# EAGLE board B684C (EAGLE 6.6.0)
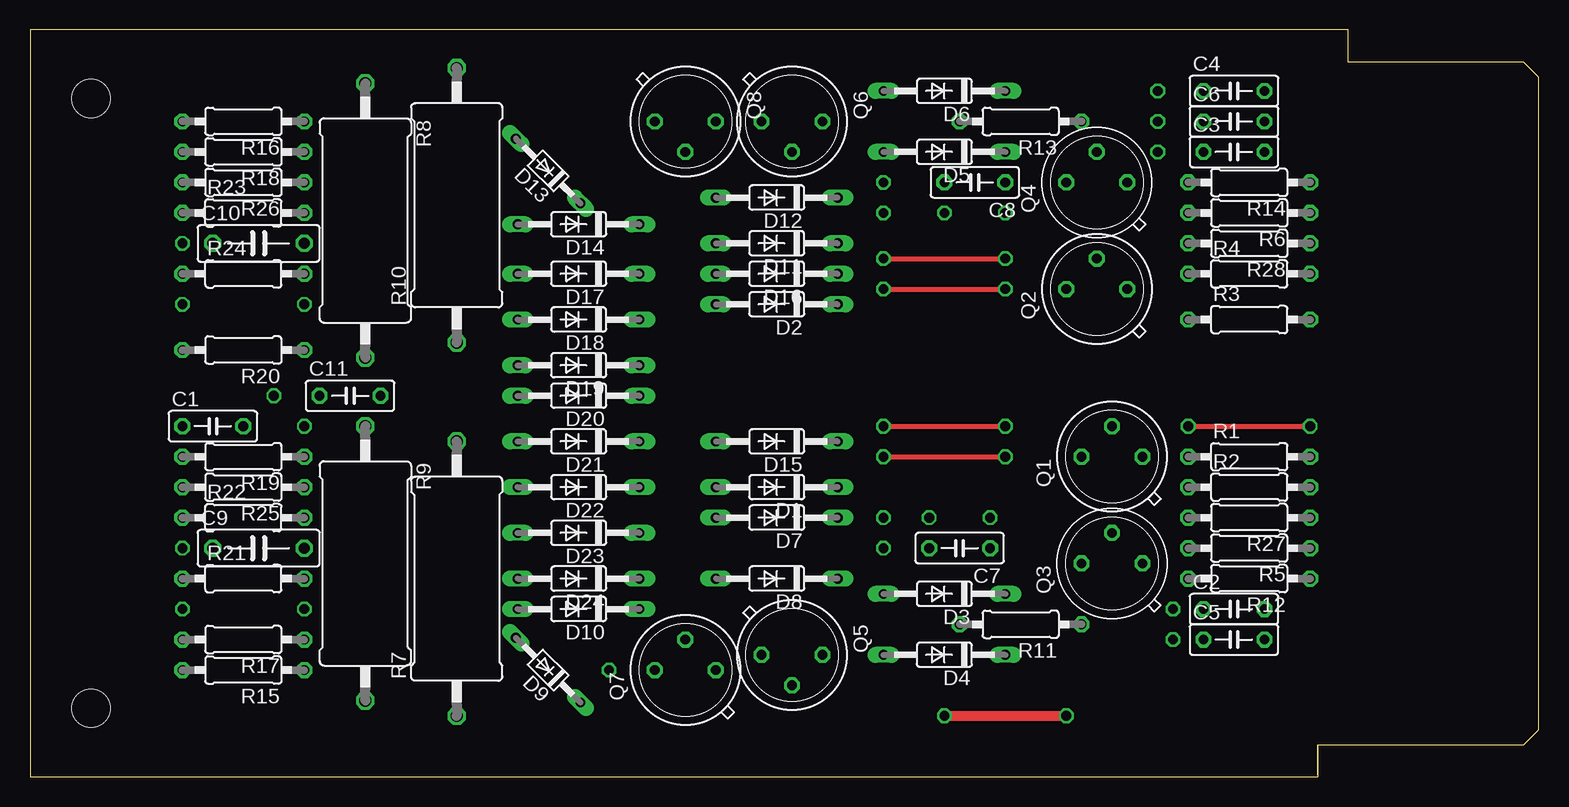
[diagram p0: board, top side]
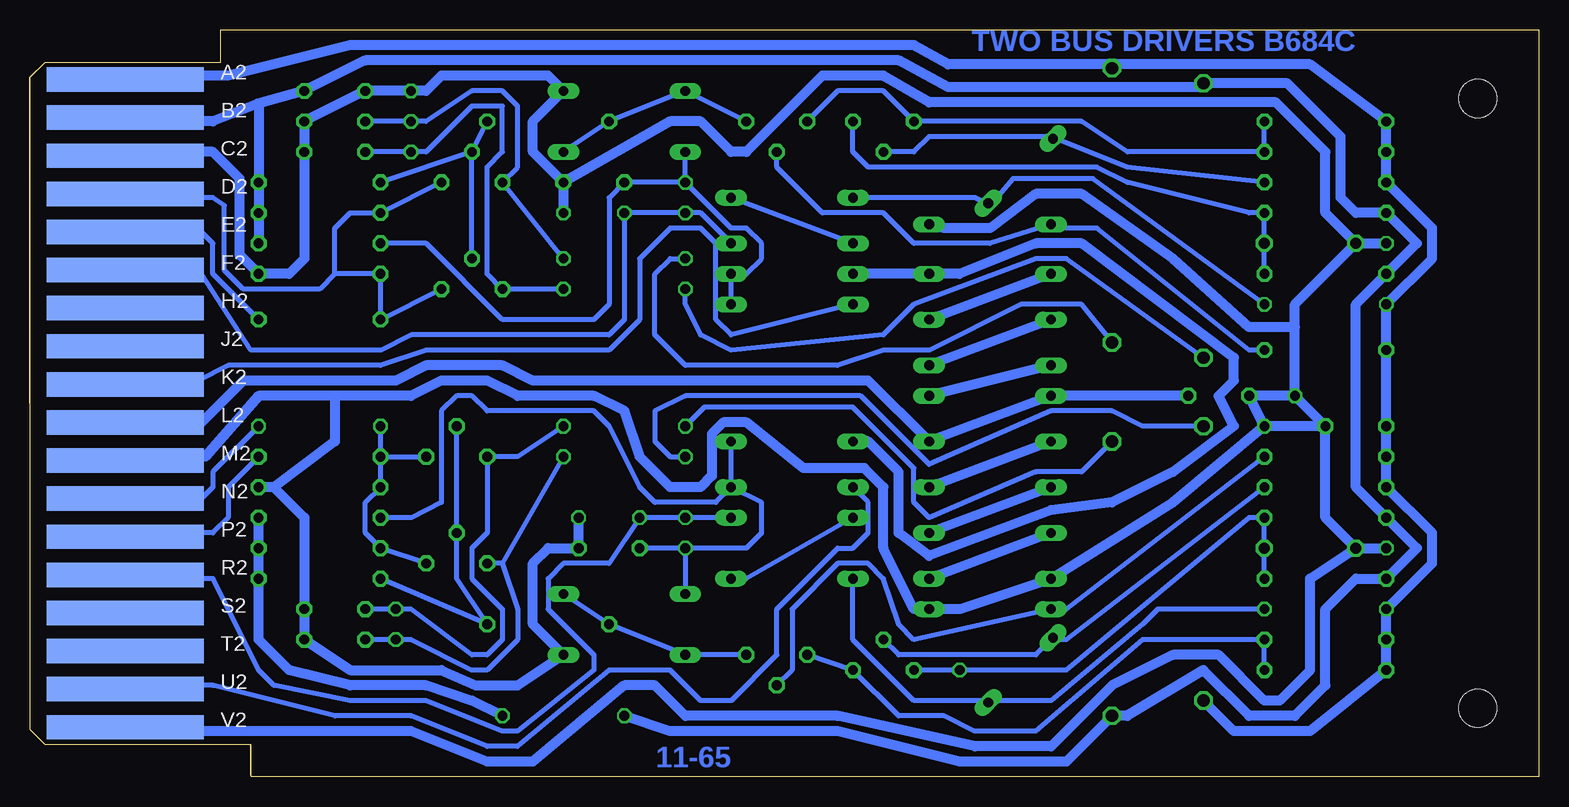
[diagram p1: board, bottom side, seen from below]

Size 125.73 x 62.23 mm. Coordinates in mm from the lower left corner, seen from the top.
Copper layers (1+16): Top 0.035mm / dielectric 1.5mm / Bottom 0.035mm
Design rules "16mils": minimum track width 16mil, minimum drill 32mil, track to track 15mil, track to pad 10mil, pad to pad 10mil, via to via 10mil, smd to smd 10mil, copper to edge 13mil, drill to drill 10mil, minimum pad ring 10mil, minimum via ring 8mil, stop-mask expansion 0mil, vias tented up to drill 0mil, thermal gap 10mil
Net classes: 1 Power: width 0.813 mm

## Footprints (pad centres in the part's own frame; a part is rotated, then mirrored left to right if it is on the bottom)
C050-025X075 = drill 0.813 octagon: 1 -2.54,0; 2 2.54,0
C075-032X103 = drill 0.914 octagon: 1 -3.81,0; 2 3.81,0
DO35-10 = drill 0.813 long: A 5.08,0; C -5.08,0
DO34-7 = drill 0.813 long: A 3.81,0; C -3.81,0
TO39 = drill 0.813 octagon: 1 0,-2.54; 2 2.54,0; 3 0,2.54
TO5 = drill 0.813 octagon: 1 0,-2.54; 2 2.54,0; 3 0,2.54
0207/10 = drill 0.813 octagon: 1 -5.08,0; 2 5.08,0
P0817/22 = drill 1.016 octagon: 1 -11.43,0; 2 11.43,0
SINGLE = hole 3.175: 120.65,56.515; 120.65,5.715
EDGE-CON1 = smd 13.106 x 2.032 bottom: A2 7.938,4.128; B2 7.938,7.303; C2 7.938,10.477; D2 7.938,13.652; E2 7.938,16.828; F2 7.938,20.003; H2 7.938,23.177; J2 7.938,26.352; K2 7.938,29.527; L2 7.938,32.703; M2 7.938,35.877; N2 7.938,39.053; P2 7.938,42.227; R2 7.938,45.403; S2 7.938,48.578; T2 7.938,51.752; U2 7.938,54.928; V2 7.938,58.102

## Placement (x,y rotation side)
C1  .01uF  [C050-025X075]  15.24,29.21 0 top
C2  .01uF  [C050-025X075]  100.33,13.97 0 top
C3  .01uF  [C050-025X075]  100.33,52.07 0 top
C4  .01uF  [C050-025X075]  100.33,57.15 0 top
C5  .01uF  [C050-025X075]  100.33,11.43 0 top
C6  .01uF  [C050-025X075]  100.33,54.61 0 top
C7  .01uF  [C050-025X075]  77.47,19.05 180 top
C8  .01uF  [C050-025X075]  78.74,49.53 180 top
C9  56pF  [C075-032X103]  19.05,19.05 0 top
C10  56pF  [C075-032X103]  19.05,44.45 0 top
C11  .01uF  [C050-025X075]  26.67,31.75 0 top
D1  1N3606  [DO35-10]  62.23,24.13 180 top
D2  1N3606  [DO35-10]  62.23,39.37 180 top
D3  1N3606  [DO35-10]  76.2,15.24 180 top
D4  1N3606  [DO35-10]  76.2,10.16 180 top
D5  1N3606  [DO35-10]  76.2,52.07 180 top
D6  1N3606  [DO35-10]  76.2,57.15 180 top
D7  1N645  [DO35-10]  62.23,21.59 180 top
D8  1N645  [DO35-10]  62.23,16.51 180 top
D9  1N645  [DO34-7]  43.18,8.89 135 top
D10  1N645  [DO35-10]  45.72,13.97 180 top
D11  1N645  [DO35-10]  62.23,44.45 180 top
D12  1N645  [DO35-10]  62.23,48.26 180 top
D13  1N645  [DO34-7]  43.18,50.48 135 top
D14  1N645  [DO35-10]  45.72,46.04 180 top
D15  1N3606  [DO35-10]  62.23,27.94 180 top
D16  1N3606  [DO35-10]  62.23,41.91 180 top
D17  1N645  [DO35-10]  45.72,41.91 180 top
D18  1N645  [DO35-10]  45.72,38.1 180 top
D19  1N645  [DO35-10]  45.72,34.29 180 top
D20  1N645  [DO35-10]  45.72,31.75 180 top
D21  1N645  [DO35-10]  45.72,27.94 180 top
D22  1N645  [DO35-10]  45.72,24.13 180 top
D23  1N645  [DO35-10]  45.72,20.32 180 top
D24  1N645  [DO35-10]  45.72,16.51 180 top
Q1  2N2904  [TO39]  90.17,26.67 90 top
Q2  2N2904  [TO39]  88.9,40.64 90 top
Q3  2N2219  [TO5]  90.17,17.78 90 top
Q4  2N2219  [TO5]  88.9,49.53 90 top
Q5  DEC6  [TO39]  63.5,10.16 270 top
Q6  DEC6  [TO39]  63.5,54.61 270 top
Q7  DEC6  [TO39]  54.61,8.89 90 top
Q8  DEC6  [TO39]  54.61,54.61 270 top
R1  82  [0207/10]  101.6,26.67 0 top
R2  220 5%  [0207/10]  101.6,24.13 0 top
R3  82  [0207/10]  101.6,38.1 0 top
R4  220 5%  [0207/10]  101.6,41.91 0 top
R5  1.5K 5%  [0207/10]  101.6,19.05 180 top
R6  1.5K 5%  [0207/10]  101.6,46.99 180 top
R7  100 2W  [P0817/22]  35.56,16.51 90 top
R8  100 2W  [P0817/22]  27.94,46.35 270 top
R9  150 2W  [P0817/22]  27.94,17.78 270 top
R10  150 2W  [P0817/22]  35.56,47.62 90 top
R11  10  [0207/10]  82.55,12.7 180 top
R12  1.5K 5%  [0207/10]  101.6,16.51 180 top
R13  10  [0207/10]  82.55,54.61 180 top
R14  1.5K 5%  [0207/10]  101.6,49.53 180 top
R15  750 5%  [0207/10]  17.78,8.89 180 top
R16  750 5%  [0207/10]  17.78,54.61 180 top
R17  750 5%  [0207/10]  17.78,11.43 180 top
R18  750 5%  [0207/10]  17.78,52.07 180 top
R19  12K  [0207/10]  17.78,26.67 180 top
R20  12K  [0207/10]  17.78,35.56 180 top
R21  560  [0207/10]  17.78,16.51 0 top
R22  560  [0207/10]  17.78,21.59 0 top
R23  560  [0207/10]  17.78,46.99 0 top
R24  560  [0207/10]  17.78,41.91 0 top
R25  100K  [0207/10]  17.78,24.13 180 top
R26  100K  [0207/10]  17.78,49.53 180 top
R27  1500 5%  [0207/10]  101.6,21.59 180 top
R28  1500 5%  [0207/10]  101.6,44.45 180 top
U$1  OUTLINE-SINGLE  [SINGLE]  125.73,62.23 180 top
U$2  EDGE-1  [EDGE-CON1]  125.73,62.23 180 top

## Library data of the parts
C1-C11 R1-R28 = rcl
D1-D24 = diode
Q1 Q2 Q5-Q8 = transistor-pnp
Q3 Q4 = transistor
U$1 U$2 = dec-con

## Nets
+10V [Power]: C1.1 R9.2 R10.2 R15.2 R16.2 R17.2 R18.2 R19.2 R20.2 R25.2 R26.2 U$2.A2
-3V [Power]: C11.2 D20.A D21.C U$2.L2
-6V@1: C7.2 D1.C D3.A D15.C R27.2
-6V@2: C8.2 D2.C D5.A D16.C R28.2
-15V [Power]: C4.2 R5.1 R6.1 R7.1 R8.1 R12.1 R14.1 R21.1 R22.1 R23.1 R24.1 R27.1 R28.1 U$2.B2
GND [Power]: C1.2 C2.2 C3.2 C4.1 C5.2 C6.2 C7.1 C8.1 C9.1 C10.1 C11.1 D4.C D6.C D10.C D14.C D24.A R2.2 R4.2 U$2.C2 U$2.M2 U$2.V2
N$1: D11.C U$2.F2
N$2: D11.A D12.C
N$3: D13.A Q8.2 R26.1
N$4: D12.A D13.C
N$6: C10.2 Q8.3 R23.2 R24.2
N$7: Q6.1 Q8.1 R16.1 R18.1
N$8: D14.A Q6.2 R20.1
N$9: Q2.1 Q4.1 R3.1 R4.1 R6.2 U$2.D2
N$10: C6.1 Q4.3 R10.1
N$11: C3.1 Q2.3 R8.2
N$12: D18.A D19.C
N$13: D22.A D23.C
N$14: D5.C D6.A Q6.3 R13.2
N$15: Q2.2 Q4.2 R13.1 R14.2
N$16: D21.A D22.C
N$17: D2.A U$2.K2
N$18: R3.2 U$2.E2
N$19: D7.C U$2.R2
N$20: D17.A D18.C
N$21: D7.A D8.C
N$22: D8.A D9.C
N$23: D9.A Q7.2 R25.1
N$24: D19.A D20.C
N$26: C9.2 Q7.3 R21.2 R22.2
N$27: Q5.1 Q7.1 R15.1 R17.1
N$28: D10.A Q5.2 R19.1
N$29: D3.C D4.A Q5.3 R11.2
N$30: Q1.2 Q3.2 R11.1 R12.2
N$31: D1.A U$2.U2
N$32: D15.A D16.A D17.C
N$33: Q1.1 Q3.1 R1.1 R2.1 R5.2 U$2.N2
N$34: C5.1 Q3.3 R9.1
N$35: C2.1 Q1.3 R7.2
N$36: R1.2 U$2.P2
N$37: D23.A D24.C

## Tracks (layer width: path | path; a pad name or v marks a point on that pad's centre or on a via)
+10V  (via drill 0.81)
  Bottom 0.813: R9.2 25.4,3.81 19.05,3.81 R15.2 R17.2 v12.7,13.97 8.89,17.78 8.89,20.32 R25.2 R19.2 C1.1 R20.2 v12.7,39.37 8.89,43.18 8.89,45.72 R26.2 R18.2 R16.2 19.05,59.37 35.56,59.37 | U$2.A2 116.84,58.42 109.22,58.42 99.06,60.96 52.07,60.96 49.21,59.37 35.56,59.37 | 35.56,59.37 R10.2
-3V
  Bottom 0.813: U$2.L2 116.84,29.21 111.76,29.21 107.95,33.02 95.25,33.02 92.71,34.29 86.36,34.29 83.82,33.02 55.88,33.02 D21.C D20.A C11.2
-6V@1  (via drill 0.81)
  Bottom 0.406: D1.C 68.58,22.86 73.66,22.86 74.93,24.13 77.47,29.21 78.74,30.48 87.63,30.48 88.9,31.75 90.17,31.75 91.44,30.48 91.44,22.86 93.98,21.59 R27.2 | v71.12,19.05 D3.A | v71.12,19.05 66.04,19.05 64.77,20.32 64.77,22.86 D1.C | v71.12,19.05 C7.2 | D1.C D15.C
-6V@2  (via drill 0.81)
  Bottom 0.406: D2.C D16.C 66.04,41.91 64.77,43.18 64.77,44.45 66.04,45.72 67.31,45.72 v71.12,49.53 | v71.12,49.53 D5.A | v71.12,49.53 C8.2 77.47,48.26 77.47,39.37 78.74,38.1 86.36,38.1 92.71,44.45 R28.2
-15V  (via drill 0.81)
  Top 0.813: v76.2,5.08 v86.36,5.08
  Bottom 0.813: R27.1 R5.1 R12.1 106.68,11.43 104.14,8.89 99.06,7.62 92.71,7.62 88.9,6.35 v86.36,5.08 | v76.2,5.08 72.39,3.81 58.42,3.81 48.26,1.27 39.37,1.27 R7.1 34.29,5.08 27.94,8.89 24.13,5.08 20.32,5.08 17.78,7.62 17.78,13.97 15.24,16.51 R21.1 10.16,19.05 R22.1 15.24,24.13 15.24,39.37 R24.1 10.16,44.45 R23.1 15.24,46.99 16.51,48.26 16.51,53.34 20.95,57.78 R8.1 27.94,57.47 49.21,57.47 53.34,59.69 97.79,59.69 C4.2 106.77,56.1 | U$2.B2 116.84,54.61 110.49,54.61 106.77,56.1 | 106.77,56.1 106.68,55.88 R14.1 R6.1 R28.1
GND  (via drill 0.81)
  Bottom 0.813: U$2.V2 117.16,4.13 116.84,3.81 93.98,3.81 87.63,1.27 83.82,1.27 76.2,7.62 73.66,7.62 71.12,5.08 58.42,5.08 46.99,2.54 40.64,2.54 35.56,7.62 30.48,10.16 26.67,10.16 22.86,6.35 21.59,6.35 19.05,8.89 19.05,16.51 C9.1 | 105.41,24.13 102.87,21.59 C2.2 C5.2 99.06,8.89 91.44,8.89 88.58,7.62 85.09,7.62 D4.C 83.82,12.7 83.82,17.78 82.55,19.05 C7.1 v80.01,21.59 | 105.41,24.13 R2.2 | U$2.M2 116.84,26.67 111.12,26.67 106.68,31.75 100.33,31.75 | 100.33,31.75 100.33,27.94 105.41,24.13 | 100.33,31.75 93.98,31.75 91.44,33.02 87.63,33.02 85.09,31.75 78.74,31.75 76.2,30.48 74.93,26.67 72.39,24.13 69.85,24.13 68.9,25.08 68.9,28.57 67.94,29.53 66.04,29.53 61.28,25.72 56.2,25.72 54.61,24.13 54.61,19.05 52.07,13.97 D10.C 48.26,13.97 D24.A 30.48,22.86 v22.86,29.21 | C1.2 v22.86,29.21 | C9.1 17.78,21.59 C1.2 | C9.1 v12.7,19.05 | C10.1 v12.7,44.45 | C1.2 v20.32,31.75 | v20.32,31.75 C11.1 v22.86,29.21 | C10.1 20.32,39.37 20.32,37.47 | v20.32,31.75 20.32,37.47 | D14.C 49.53,45.72 45.72,45.72 41.91,48.58 38.1,48.58 30.48,43.18 24.13,37.47 20.32,37.47 | U$2.C2 116.84,52.07 110.49,52.07 108.27,49.85 108.27,43.5 R4.2 104.14,41.91 102.87,43.18 C3.2 C6.2 C4.1 v93.98,57.15 92.71,57.15 91.44,58.42 82.55,58.42 D6.C 83.82,54.61 83.82,52.07 C8.1 | C8.1 v81.28,46.99 | C8.1 72.39,54.61 69.85,54.61 67.31,52.07 66.04,52.07 59.69,58.42 54.61,58.42 50.8,56.2 21.91,56.2 17.78,52.07 17.78,46.99 C10.1
N$1  (via drill 0.81)
  Bottom 0.406: D11.C 69.85,46.99 v71.12,46.99 v76.2,46.99 76.2,38.1 77.47,36.83 93.98,36.83 96.52,35.56 107.31,35.56 111.44,41.91 116.84,41.91 U$2.F2
N$2
  Bottom 0.406: D11.A D12.C
N$3
  Bottom 0.406: R26.1 34.29,50.8 40.64,53.34 | 40.64,53.34 50.8,53.34 52.07,52.07 Q8.2 | 40.64,53.34 D13.A
N$4  (via drill 0.81)
  Bottom 0.406: 45.72,47.62 D13.C | 45.72,47.62 46.99,48.26 D12.A | 45.72,47.62 43.81,49.85 37.15,49.85 v22.86,39.37
N$6
  Bottom 0.406: Q8.3 57.15,52.07 55.88,50.8 36.83,50.8 34.29,49.53 24.13,46.99 R23.2 C10.2 R24.2
N$7
  Bottom 0.406: R16.1 R18.1 34.29,52.07 38.1,54.61 Q8.1 54.61,57.15 58.42,57.15 Q6.1
N$8
  Bottom 0.406: Q6.2 63.5,50.8 59.69,46.99 54.61,46.99 52.07,44.45 45.72,44.45 D14.A 39.37,45.72 36.83,45.72 24.13,35.56 R20.1
N$9
  Bottom 0.406: Q2.1 R3.1 R4.1 100.33,41.91 | Q4.1 R6.2 99.06,46.99 100.33,45.72 100.33,41.91 | U$2.D2 116.84,48.26 110.49,48.26 109.54,47.62 109.54,42.23 107.95,40.64 101.6,40.64 100.33,41.91
N$10  (via drill 0.81)
  Top 0.406: v71.12,43.18 v81.28,43.18
  Bottom 0.406: R10.1 38.1,39.37 43.18,39.37 50.8,35.56 54.61,35.56 58.42,34.29 71.12,34.29 73.66,36.83 73.66,41.91 72.39,43.18 v71.12,43.18 | v81.28,43.18 Q4.3 85.09,50.8 85.09,55.88 86.36,57.15 88.9,57.15 92.71,54.61 v93.98,54.61 C6.1
N$11  (via drill 0.81)
  Top 0.406: v71.12,40.64 v81.28,40.64
  Bottom 0.406: R8.2 39.37,43.18 41.91,43.18 52.07,39.37 54.61,36.83 67.31,35.56 69.85,36.83 71.12,39.37 v71.12,40.64 | v81.28,40.64 Q2.3 87.63,41.91 87.63,50.8 86.36,52.07 86.36,55.88 88.9,55.88 92.71,52.07 v93.98,52.07 C3.1
N$12
  Bottom 0.813: D18.A D19.C
N$13
  Bottom 0.813: D22.A D23.C
N$14
  Bottom 0.406: Q6.3 D6.A R13.2 D5.C
N$15
  Bottom 0.406: Q4.2 R13.1 | Q4.2 R14.2 | Q2.2 Q4.2
N$16
  Bottom 0.813: D21.A D22.C
N$17
  Bottom 0.406: U$2.K2 116.84,33.02 111.76,33.02 109.22,34.29 96.52,34.29 92.71,35.56 77.47,35.56 74.93,38.1 74.93,43.18 72.39,45.72 69.85,45.72 68.58,44.45 68.58,38.1 67.31,36.83 D2.A
N$18
  Bottom 0.406: U$2.E2 116.84,45.72 111.76,45.72 110.49,44.45 110.49,41.91 R3.2
N$19  (via drill 0.81)
  Bottom 0.406: U$2.R2 116.84,16.51 110.49,16.51 106.68,8.89 105.41,7.62 99.06,6.35 92.71,6.35 86.36,3.81 85.09,3.81 78.74,8.89 78.74,10.16 82.55,13.97 82.55,16.51 81.28,17.78 77.47,17.78 v74.93,21.59 v71.12,21.59 D7.C
N$20
  Bottom 0.813: D17.A D18.C
N$21
  Bottom 0.406: D7.A 66.04,16.51 D8.C
N$22  (via drill 0.81)
  Bottom 0.406: D8.A 57.15,11.43 52.07,6.35 45.72,6.35 | 45.72,6.35 D9.C | 45.72,6.35 40.64,6.35 33.02,12.7 31.75,13.97 v22.86,13.97
N$23
  Bottom 0.406: R25.1 39.37,11.43 40.64,11.43 | 40.64,11.43 D9.A | Q7.2 53.34,10.16 41.91,10.16 40.64,11.43
N$24
  Bottom 0.813: D19.A D20.C
N$26  (via drill 0.81)
  Bottom 0.406: R21.2 C9.2 R22.2 24.13,21.59 39.37,8.89 v48.26,8.89 Q7.3
N$27
  Bottom 0.406: R15.1 R17.1 33.02,11.43 41.91,3.81 46.99,3.81 49.53,5.08 53.34,5.08 Q7.1 Q5.1
N$28
  Bottom 0.406: R19.1 39.37,13.97 D10.A 52.07,11.43 53.34,12.7 54.61,16.51 55.88,17.78 58.42,17.78 62.23,13.97 62.23,8.89 Q5.2
N$29
  Bottom 0.406: Q5.3 D4.A R11.2 D3.C
N$30
  Bottom 0.406: Q1.2 Q3.2 90.17,16.51 R11.1 R12.2
N$31
  Bottom 0.406: U$2.U2 116.84,7.62 110.49,7.62 100.33,5.08 93.98,5.08 87.63,2.54 85.09,2.54 77.47,8.89 72.39,8.89 69.85,6.35 67.31,6.35 63.5,10.16 63.5,13.97 58.42,19.05 57.15,19.05 55.88,20.32 55.88,22.86 D1.A
N$32
  Bottom 0.813: D16.A D17.C 48.26,41.91 41.91,44.45 38.1,44.45 25.4,34.92 25.4,33.02 26.67,31.75 25.4,29.21 30.48,25.4 35.56,22.86 40.64,22.23 50.8,18.41 53.34,20.32 53.34,25.4 55.88,27.94 D15.A
N$33  (via drill 0.81)
  Top 0.406: v96.52,29.21 v106.68,29.21
  Bottom 0.406: U$2.N2 116.84,22.86 111.76,22.86 110.49,24.13 110.49,25.4 v106.68,29.21 | R1.1 v96.52,29.21 | R1.1 Q1.1 | R1.1 R2.1 97.79,22.86 97.79,20.32 R5.2 Q3.1
N$34  (via drill 0.81)
  Top 0.406: v71.12,26.67 v81.28,26.67
  Bottom 0.406: C5.1 v95.25,11.43 93.98,11.43 88.9,8.89 87.63,8.89 85.09,11.43 85.09,13.97 86.36,17.78 | 86.36,17.78 Q3.3 | R9.1 33.02,29.21 35.56,30.48 40.64,30.48 50.8,26.04 56.52,31.75 71.12,31.75 73.66,30.48 73.66,27.94 72.39,26.67 v71.12,26.67 | v81.28,26.67 86.36,17.78
N$35  (via drill 0.81)
  Top 0.406: v71.12,29.21 v81.28,29.21
  Bottom 0.406: C2.1 v95.25,13.97 93.98,13.97 88.9,10.16 87.63,10.16 86.36,11.43 86.36,13.97 88.9,16.51 88.9,19.05 87.63,20.32 Q1.3 85.09,26.67 v81.28,29.21 | R7.2 38.1,25.4 41.91,25.4 50.8,21.59 52.07,22.86 52.07,25.72 57.15,30.8 69.53,30.8 v71.12,29.21
N$36
  Bottom 0.406: U$2.P2 116.84,20.32 110.49,20.32 109.22,21.59 109.22,24.13 R1.2
N$37
  Bottom 0.813: D23.A D24.C

## Text on the board
Bottom: TWO BUS DRIVERS B684C | 11-65